# Altium PCB PCB1.PcbDoc
Units mil, origin at the board's own origin, x right, y up, seen from the top; angles counter-clockwise.
Board outline 3040 x 2075 mil, 2 copper layers (Top Layer, Bottom Layer); 46 components, 37 nets, 214 pads, 17 vias.
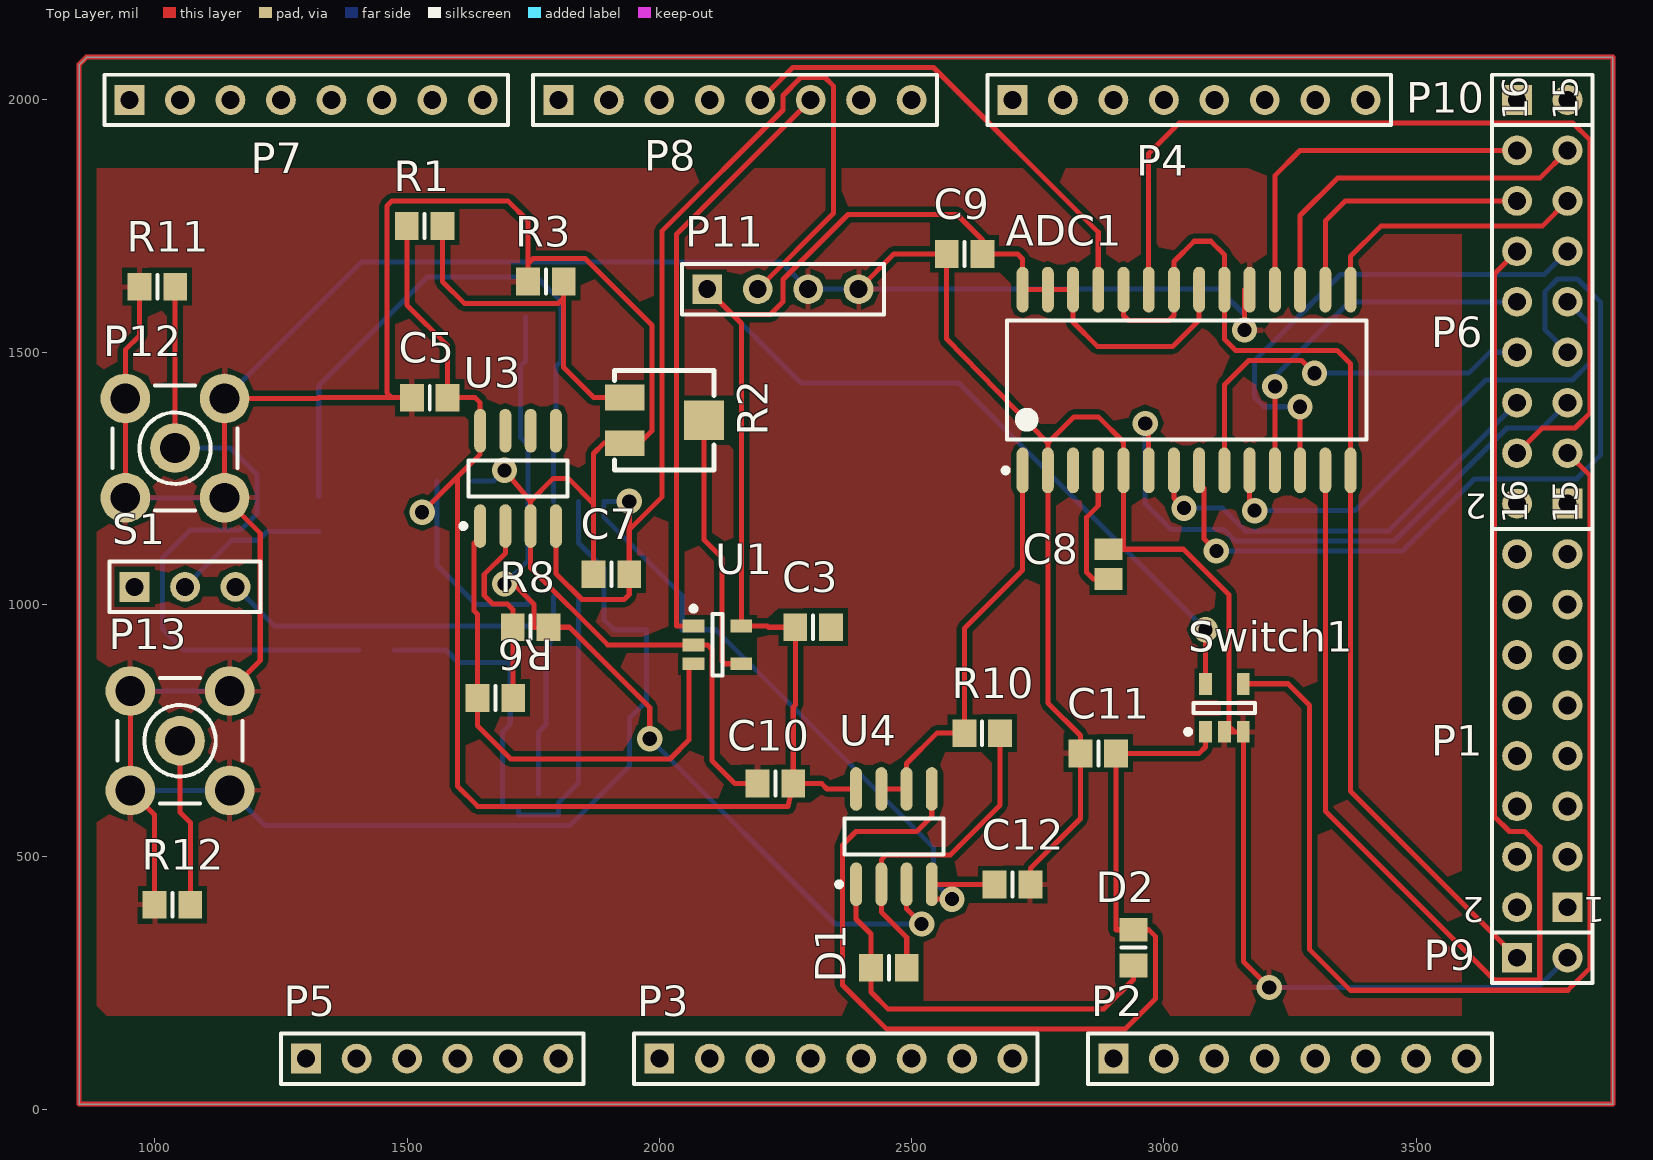
[diagram p0: Top Layer view]
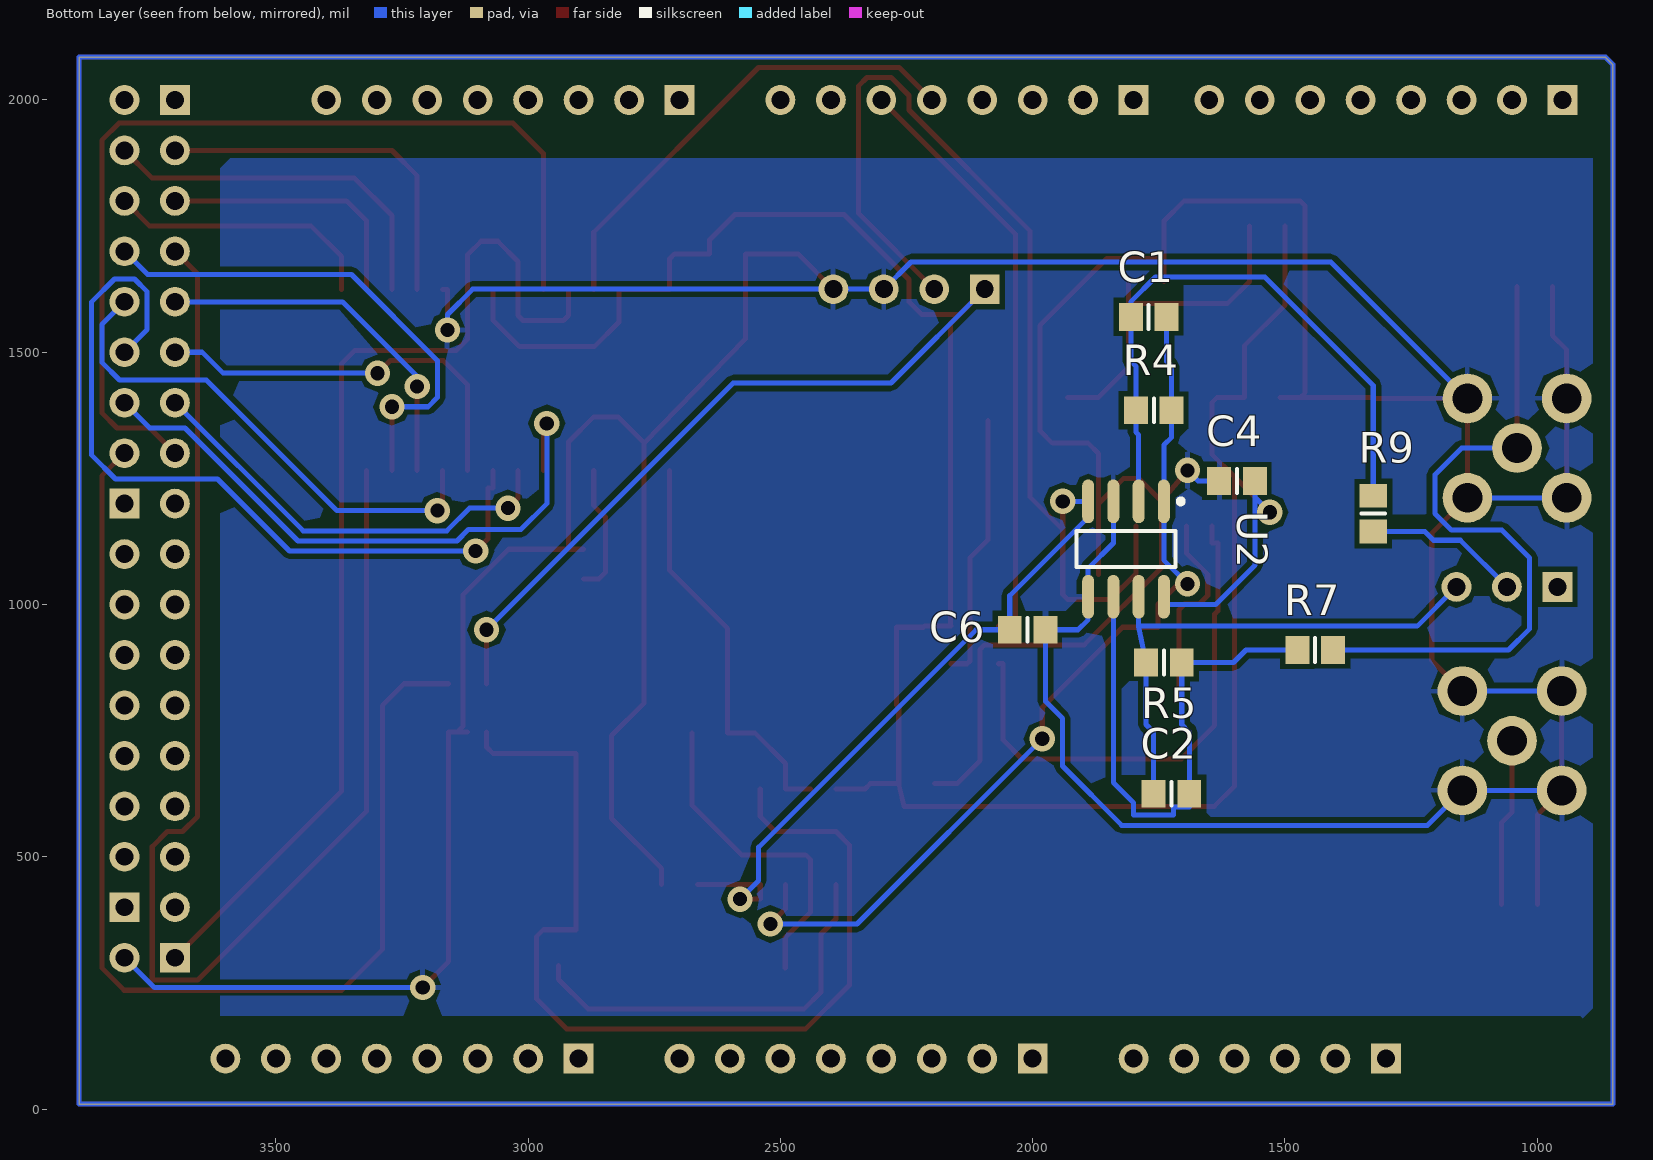
[diagram p1: Bottom Layer view, seen from below]

## Layer stack, top to bottom
Top Layer: signal copper 1.4
Dielectric: dielectric 12.6, FR-4, Dk 4.8
Bottom Layer: signal copper 1.4

## Board outline
850,10 850,2070 865,2085 3890,2085 3890,10

## Design rules (kind name [scope] priority, off if disabled: settings)
Clearance [All] p1: gap=10
PolygonConnect [All] p1: connectstyle=Relief reliefconductorwidth=10 reliefentries=4 polygonreliefangle="90 Angle"
RoomDefinition Sheet1 [InComponentClass('Sheet1')] p1: confinementstyle=ConfineIn formatcopy=TRUE lockcomponents=FALSE outline 850,10 3885,10 3885,2080 850,2080
RoutingTopology [InNetClass('digital')] p1: topology=Shortest
RoutingVias [All] p1: holewidth=28 width=50 viastyle="Through Hole" minholewidth=28 minwidth=50 maxholewidth=28 maxwidth=50
SilkscreenOverComponentPads [All] p1: minsilkscreentomaskgap=10
SolderMaskExpansion [All] p1: expansion=4
Width [All] p1: maxlimit=10 minlimit=10 preferedwidth=10
26 further rules are at their usual default settings.

## Classes and differential pairs
net class analog: NetADC1_1 NetADC1_4 NetC1_1 NetC1_2 NetC2_1 NetC2_2 NetC11_2 NetD1_1 NetD1_2 NetP12_1 NetP13_1 NetR1_2 NetR2_W NetR6_2
net class potencia: +5 -5 GND
net class digital: DGND NetADC1_6 NetADC1_7 NetADC1_8 NetADC1_9 NetADC1_10 NetADC1_11 NetADC1_12 NetADC1_13 NetADC1_15 NetADC1_16 NetADC1_17 NetADC1_18 NetADC1_23 NetADC1_25 NetP6_3

## Components (designator, comment, footprint, x,y, rotation, side; value= is the part's Value field where it differs from the comment)
ADC1 "LTC1415" SO28_N 3045,1445 r90 top
C1 "Cap" 6-0805_N 1770,1570 r180 bottom
C2 "Cap" 6-0805_N 1725,625 r0 bottom
C3 "Cap" 6-0805_N 2305,955 r0 top
C4 "Cap" 6-0805_N 1595,1245 r180 bottom
C5 "Cap" 6-0805_N 1545,1410 r0 top
C6 "Cap" 6-0805_N 2010,950 r180 bottom
C7 "Cap" 6-0805_N 1905,1060 r180 top
C8 "Cap Pol3" C0805 2890,1080 r90 top
C9 "Cap" 6-0805_N 2605,1695 r180 top
C10 "Cap" 6-0805_N 2230,645 r0 top
C11 "Cap" 6-0805_N 2870,705 r0 top
C12 "Cap" 6-0805_N 2700,445 r0 top
D1 "Diode" 6-0805_N 2455,280 r180 top
D2 "Diode" 6-0805_N 2940,320 r90 top
P1 "Header 8X2" HDR2X8 3800,400 r90 top
P2 "Header 8" HDR1X8 2900,100 r0 top
P3 "Header 8" HDR1X8 2000,100 r0 top
P4 "Header 8" HDR1X8 2700,2000 r0 top
P5 "Header 6" HDR1X6 1300,100 r0 top
P6 "Header 8X2" HDR2X8 3800,1200 r90 top
P7 "Header 8" HDR1X8 950,2000 r0 top
P8 "Header 8" HDR1X8 1800,2000 r0 top
P9 "Header 2" HDR1X2 3700,300 r0 top
P10 "Header 2" HDR1X2 3700,2000 r0 top
P11 "Header 4" HDR1X4 2095,1625 r0 top
P12 "SMB" SMB_V-RJ45 1040,1310 r0 top
P13 "SMB" SMB_V-RJ45 1050,730 r0 top
R1 "Res3" 6-0805_N 1535,1750 r0 top
R2 "RPot SM" POT4MM-2 2010,1365 r0 top
R3 "Res3" 6-0805_N 1775,1640 r0 top
R4 "Res3" 6-0805_N 1760,1385 r180 bottom
R5 "Res3" 6-0805_N 1740,885 r180 bottom
R6 "Res3" 6-0805_N 1675,815 r180 top
R7 "Res3" 6-0805_N 1440,910 r180 bottom
R8 "Res3" 6-0805_N 1745,955 r180 top
R9 "Res3" 6-0805_N 1325,1180 r90 bottom
R10 "Res3" 6-0805_N 2640,745 r0 top
R11 "Res3" 6-0805_N 1005,1630 r0 top
R12 "Res3" 6-0805_N 1035,405 r0 top
S1 "SW-SPDT" HDR1X3 960,1035 r0 top
Switch1 "SN74LVC1G66DBVR" SOT23-5_N 3120,795 r90 top
U1 "ADCMP600" SOT23-5_N 2115,920 r0 top
U2 "THS4062" S8_N 1815,1110 r270 bottom
U3 "THS4062" S8_N 1720,1250 r90 top
U4 "THS4062" S8_N 2465,540 r90 top

## Footprints (in the part's own frame and the unit in brackets; to place one, negate y for a bottom-side part, rotate by r counter-clockwise, add the part's x,y. Pads: shape width x height; smd on the part's side, far side on the other; paste and mask are expansions set on the pad)
6-0805_N [mm] "Chip Resistor, Body 2.0x1.2mm, IPC Medium Density"
  rect 1.2x1.4 smd: 1(-0.9,0) 2(0.9,0)
  silkscreen extent 0,-0.6 0,0.6, body extent -1.07,-0.7 1.07,0.7, height 0.7
C0805 [mm] "Chip Capacitor, Body 2.0x1.3mm, IPC High Density"
  rect 1.1x1.4 smd: 1(-0.75,0) 2(0.75,0)
  body extent -1.1,-0.72 1.1,0.72, height 1.4
HDR1X2 [mm] "Connector; Header; 2 Position"
  rect 1.5x1.5 hole 0.9: 1(0,0)
  round 1.5 hole 0.9: 2(2.54,0)
  silkscreen extent -1.27,-1.27 3.81,1.27
HDR1X3 [mm] "Connector; Header; 3 Position"
  rect 1.5x1.5 hole 0.9: 1(0,0)
  round 1.5 hole 0.9: 2(2.54,0) 3(5.08,0)
  silkscreen extent -1.27,-1.27 6.35,1.27
HDR1X4 [mm] "Connector; Header; 4 Position"
  rect 1.5x1.5 hole 0.9: 1(0,0)
  round 1.5 hole 0.9: 2(2.54,0) 3(5.08,0) 4(7.62,0)
  silkscreen extent -1.27,-1.27 8.89,1.27
HDR1X6 [mm] "Connector; Header; 6 Position"
  rect 1.5x1.5 hole 0.9: 1(0,0)
  round 1.5 hole 0.9: 2(2.54,0) 3(5.08,0) 4(7.62,0) 5(10.16,0) 6(12.7,0)
  silkscreen extent -1.27,-1.27 13.97,1.27
HDR1X8 [mm] "Connector; Header; 8 Position"
  rect 1.5x1.5 hole 0.9: 1(0,0)
  round 1.5 hole 0.9: 2(2.54,0) 3(5.08,0) 4(7.62,0) 5(10.16,0) 6(12.7,0) 7(15.24,0) 8(17.78,0)
  silkscreen extent -1.27,-1.27 19.05,1.27
HDR2X8 [mm] "Connector; Header; 8x2 Position"
  rect 1.5x1.5 hole 0.9: 1(0,0)
  round 1.5 hole 0.9: 2(0,2.54) 3(2.54,0) 4(2.54,2.54) 5(5.08,0) 6(5.08,2.54) 7(7.62,0) 8(7.62,2.54) 9(10.16,0) 10(10.16,2.54) 11(12.7,0) 12(12.7,2.54) 13(15.24,0) 14(15.24,2.54) 15(17.78,0) 16(17.78,2.54)
  silkscreen extent -1.27,-1.27 19.05,3.81
POT4MM-2 [mm] "Square Trimming Potentiometer"
  rect 2x1.3 smd: CCW(-2,-1.15) CW(-2,1.15)
  rect 2x2 smd: W(2,0)
  silkscreen extent -2.5,-2.5 2.5,2.5
S8_N [mm] "SOIC, 8-Leads, Body 4.9x3.9mm, Pitch 1.27mm, IPC Medium Density"
  oval 2.2x0.6 smd: 1(-2.4,1.905) 2(-2.4,0.635) 3(-2.4,-0.635) 4(-2.4,-1.905) 5(2.4,-1.905) 6(2.4,-0.635) 7(2.4,0.635) 8(2.4,1.905)
  silkscreen extent -2.52,-2.5 0.9,2.88, body extent -2,-2.5 2,2.5, height 1.76
SMB_V-RJ45 [mm] "Connector; SMB Straight"
  round 2.5 hole 1.5: 1(0,0) 2(-2.5,-2.5) 2(-2.5,2.5) 2(2.5,-2.5) 2(2.5,2.5)
  silkscreen extent -3.15,-3.15 3.15,3.15
SO28_N [mm] "28-Pin Plastic Small Outline Integrated Circuit 1.27 mm Pitch, IPC Medium Density"
  oval 2.3x0.6 smd: 1(-4.55,8.255) 2(-4.55,6.985) 3(-4.55,5.715) 4(-4.55,4.445) 5(-4.55,3.175) 6(-4.55,1.905) 7(-4.55,0.635) 8(-4.55,-0.635) 9(-4.55,-1.905) 10(-4.55,-3.175) 11(-4.55,-4.445) 12(-4.55,-5.715) 13(-4.55,-6.985) 14(-4.55,-8.255) 15(4.55,-8.255) 16(4.55,-6.985) 17(4.55,-5.715) 18(4.55,-4.445) 19(4.55,-3.175) 20(4.55,-1.905) 21(4.55,-0.635) 22(4.55,0.635) 23(4.55,1.905) 24(4.55,3.175) 25(4.55,4.445) 26(4.55,5.715) 27(4.55,6.985) 28(4.55,8.255)
  silkscreen extent -4.67,-9.05 3,9.23, body extent -3.8,-9.06 3.8,9.06, height 2.65
SOT23-5_N [mm] "SOT23, 5-Leads, Body 2.9x1.6mm, Pitch 0.95mm, Lead Span 2.8mm, IPC Medium Density"
  rect 1.1x0.65 smd: 1(-1.2,0.95) 2(-1.2,0) 3(-1.2,-0.95) 4(1.2,-0.95) 5(1.2,0.95)
  silkscreen extent -1.32,-1.55 0.25,1.95, body extent -0.9,-1.55 0.9,1.55, height 1.45

## Part data
C1 C2 C3 C4 C5 C6 C7 C9 C10 C11 C12: "Capacitor"
C8: "Polarized Capacitor (Surface Mount)"
D1 D2: "Default Diode"
P1 P6: "Header, 8-Pin, Dual row"
P2 P3 P4 P7 P8: "Header, 8-Pin"
P5: "Header, 6-Pin"
P9 P10: "Header, 2-Pin"
P11: "Header, 4-Pin"
P12 P13: "SMB Straight Connector"
R1 R3 R4 R5 R6 R7 R8 R9 R10 R11 R12: "Resistor"
R2: "Square Trimming Potentiometer"
S1: "SPDT Subminiature Toggle Switch, Right Angle Mounting, Vertical Actuation"
U2 U3 U4: library part LT1253CS8, "Low Cost Dual Video Amplifier"

## Via types
v1: diameter 50, hole 28, Top Layer to Bottom Layer, 17 vias

## Nets (pads, with @x,y where several pads share a name; then routed paths per layer and width w, separated by ;. In a path a pad name is that pad's centre, name@x,y a point inside that pad or via, vN(x,y) a via of type N, cw(c..) or ccw(c..) an arc to the next point about the centre after c; other vN are vias at no path point)
+5: ADC1.21 ADC1.26 ADC1.27 ADC1.28 C3.1 C4.2 C5.2 C9.1 C10.2 P11.1 R1.1 Switch1.5 U1.5 U2.8 U3.8 U4.8 | length 6407.2
  Top Layer w10: R1.1 1499.57,1593.87 1580.43,1513 C5.2 1635,1410 1645,1400 U3.8 1645,1298 1600,1253 ; v1(1530,1183) 1600,1253 ; P11.1 2145,1575 ; U1.5 U1.5@2163,957.4 ; U4.8 2332.51,634.49 2322,645 C10.2 ; ADC1.21 3070,1564 3017,1511 2869,1511 2820,1560 ADC1.26 ADC1.27 ADC1.28 2720,1685 2710,1695 C9.1 2640.43,1722.57 2590,1773 2374,1773 2245,1644 2245,1600 2220,1575 2145,1575 ; Switch1.5 v1(3082.6,950) ; 1600,1253 1600,640 1640,600 2255.43,600 C10.2 ; 2145,1575 2163,1557 U1.5@2163,957.4 ; U1.5@2163,957.4 2214,957.4 2216.4,955 C3.1 2269.57,801.13 2265.43,797 C10.2
  Bottom Layer w10: v1(1530,1183) 1559.57,1212.57 ; C4.2 1559.57,1212.57 ; U2.8 1740,1000.2 1637.36,1000.2 1559.57,1078 1559.57,1212.57 ; P11.1 2281,1439 2593.6,1439 v1(3082.6,950)
-5: C6.1 C7.1 C12.1 P11.2 U2.4 U3.4 U4.4 | length 3380.8
  Top Layer w10: U3.4 1795,1061.62 1846.62,1010 1930.43,1010 1940.43,1020 C7.1 1940.43,1148.43 ; v1(1940.43,1204.49) 1940.43,1148.43 ; P11.2 2345,1775 2345,2028 2328.47,2044.53 2280.53,2044.53 2245,2009 2245,1980 2005.63,1740.63 2005.63,1213.63 1940.43,1148.43 ; v1(2580,416) 2540,416 U4.4 2602,445.51 2602.51,445 C12.1
  Bottom Layer w10: v1(1940.43,1204.49) U2.4 1890,1173 2045.43,1017.57 C6.1 2112,950 2543,519 2543,453 v1(2580,416)
DGND: ADC1.14 ADC1.20 ADC1.22 ADC1.24 P9.1 | length 2145.2
  Top Layer w10: ADC1.24 2920,1573 2930,1563 3010,1563 3020,1573 ADC1.22 3020,1680 3060,1720 3093,1720 3120,1693 ADC1.20 3120,1526 3142.14,1503.86 3343.14,1503.86 3370,1477 ADC1.14 3370,630 P9.1
GND: ADC1.2 ADC1.5 ADC1.19 C4.1 C5.1 C6.2 C7.2 C8.2 C9.2 C10.1 C11.1 C12.2 P9.2 P11.3 P11.4 P12.2 P13.2 R2.CCW R3.1 R11.1 R12.1 Switch1.2 Switch1.3 U1.2 U2.3 U2.5 U3.3 | length 12907.1
  Top Layer w10: P12.2@941.57,1211.57 941.57,1408.43 941.57,1505 969.57,1532.99 R11.1 ; P13.2@951.57,828.43 951.57,631.57 999.57,583.58 R12.1 ; P13.2@1148.43,828.43 1209,889 1209,1141 1138.43,1211.57 1138.43,1408.43 1323,1408.43 1324.57,1410 1470,1410 ; C5.1 1470,1410 ; v1(1693,1266) 1745,1205 ; R3.1 1739.57,1675.57 ; C7.2 1869.57,1200 ; C10.1 2150,645 2104.41,690.59 2104.41,911 2095.41,920 U1.2 1897.56,920 1745,1072.56 U3.3 1745,1205 ; P11.4 2465,1695 C9.2 2569.57,1526.43 2770,1320 ; C12.2 2735.43,476.87 2834.57,576 C11.1 2834.57,740.43 2770,805 ADC1.2 2770,1320 ; C8.2 2920,1109.53 ; Switch1.2 3140,747.76 ; v1(3160,1544) 3160,1624.13 ADC1.19 ; v1(3209,241) 3157.4,292.6 Switch1.3 3140,747.76 ; 1470,1410 1460,1420 1460,1790 1470,1800 1699.57,1800 1739.57,1760 1739.57,1675.57 ; 1739.57,1675.57 1750,1686 1853,1686 1985.63,1553.37 1985.63,1344.36 1961,1319.72 R2.CCW 1890,1319.72 1869.57,1299.29 1869.57,1200 ; 1745,1205 1790,1250 1819.57,1250 1869.57,1200 ; 2770,1320 2822,1372 2870,1372 2920,1322 ADC1.5 2920,1109.53 ; 2920,1109.53 3039.13,1109.53 3129,1019.66 3129,758.76 3140,747.76
  Bottom Layer w10: P12.2@941.57,1211.57 P12.2@1138.43,1211.57 ; P13.2@951.57,631.57 1148.43,631.57 1217.56,562.44 1823.44,562.44 1940.91,679.91 1940.91,774.37 1974.57,808.03 C6.2 1910,950 1890,970 U2.5 1890,1072 1840,1122 U2.3 ; P13.2@951.57,828.43 P13.2@1148.43,828.43 ; P12.2@1138.43,1408.43 1409,1679 2241,1679 P11.3 P11.4 3110,1625 3160,1575 v1(3160,1544) ; C4.1 1672,1245 v1(1693,1266) ; v1(3209,241) 3741,241 P9.2
NetADC1_1: ADC1.1 R10.1 U4.6 U4.7 | length 808.6
  Top Layer w10: U4.7 U4.6 2490,685 2550,745 R10.1 2604.57,952.57 2720,1068 ADC1.1
NetADC1_4: ADC1.4 C8.1 | length 260.3
  Top Layer w10: ADC1.4 2870,1196 2847,1173 2847,1063.47 2860,1050.47 C8.1
NetADC1_6: ADC1.6 P6.5 | length 1236.2
  Top Layer w10: v1(2963,1359) 2970,1352 ADC1.6
  Bottom Layer w10: v1(2963,1359) 2963,1200 3014,1149 3118,1149 3141,1126 3456,1126 3680,1350 3750,1350 P6.5
NetADC1_7: ADC1.7 P6.6 | length 867
  Top Layer w10: ADC1.7 3020,1211 v1(3040,1191)
  Bottom Layer w10: v1(3040,1191) 3116.13,1191 3161.13,1146 3446,1146 P6.6
NetADC1_8: ADC1.8 P6.7 | length 1601.1
  Top Layer w10: ADC1.8 3070,1231 3080,1231 3080,1130 v1(3104,1106)
  Bottom Layer w10: v1(3104,1106) 3473,1106 3615.65,1248.65 3817.65,1248.65 3865,1296 3865,1600 3820,1645 3780,1645 3755,1620 3755,1545 P6.7
NetADC1_9: ADC1.9 P6.8 | length 797.5
  Top Layer w10: ADC1.9 3120,1435.82 3168.03,1483.86 3273.14,1483.86 v1(3298.5,1458.5)
  Bottom Layer w10: v1(3298.5,1458.5) 3604.5,1458.5 3646,1500 P6.8
NetADC1_10: ADC1.10 P6.9 | length 1009.4
  Top Layer w10: ADC1.10 3170,1196 v1(3180,1186)
  Bottom Layer w10: v1(3180,1186) 3378.83,1186 3637.83,1445 3810,1445 3845,1480 3845,1555 P6.9
NetADC1_11: ADC1.11 P6.10 | length 727.4
  Top Layer w10: ADC1.11 v1(3220,1432)
  Bottom Layer w10: v1(3220,1432) 3220,1452 3368,1600 P6.10
NetADC1_12: ADC1.12 P6.11 | length 1006.8
  Top Layer w10: ADC1.12 v1(3270,1392)
  Bottom Layer w10: v1(3270,1392) 3198.25,1392 3180,1410.25 3180,1483.86 3350.14,1654 3754,1654 P6.11
NetADC1_13: ADC1.13 P6.12 | length 2756.9
  Top Layer w10: ADC1.13 3320,590.94 3655.47,255.47 3745,255.47 3745,520 3715,550 3685,550 3655,580 3655,1655 P6.12
NetADC1_15: ADC1.15 P6.13 | length 541.4
  Top Layer w10: ADC1.15 3370,1690 3430,1750 3750,1750 P6.13
NetADC1_16: ADC1.16 P6.14 | length 532.4
  Top Layer w10: ADC1.16 3320,1760 3360,1800 P6.14
NetADC1_17: ADC1.17 P6.15 | length 730.3
  Top Layer w10: ADC1.17 3270,1771 3344,1845 3745,1845 P6.15
NetADC1_18: ADC1.18 P6.16 | length 726.6
  Top Layer w10: ADC1.18 3220,1850 3270,1900 P6.16
NetADC1_23: ADC1.23 P6.4 | length 1901.9
  Top Layer w10: ADC1.23 2970,1894 3030,1954 3811,1954 3845,1920 3845,1380 3815,1350 3750,1350 P6.4
NetADC1_25: ADC1.25 P8.5 | length 945.8
  Top Layer w10: P8.5 2264.53,2064.53 2543.47,2064.53 2870,1738 ADC1.25
NetC1_1: C1.1 R4.1 R9.2 U2.2 | length 1210.3
  Bottom Layer w10: R9.2 1325,1434 1540,1649 1756.43,1649 1805.43,1600 C1.1 1805.43,1482 1795.43,1472 R4.1 1795.43,1341.56 1790,1336.13 U2.2
NetC1_2: C1.2 R4.2 R8.1 U2.1 U4.3 | length 1818.8
  Top Layer w10: v1(1693,1041) 1711,1041 1752,1000 1752,955 R8.1 1822,955 1981,796 v1(1981,734) ; U4.3 2490,397 v1(2520,367)
  Bottom Layer w10: v1(1693,1041) 1740,1088 U2.1 1740,1316.13 1724.57,1331.56 R4.2 1724.57,1472 1734.57,1482 C1.2 ; v1(1981,734) 2348,367 v1(2520,367)
NetC2_1: C2.1 R5.2 R7.1 U2.6 | length 1108.3
  Bottom Layer w10: R7.1 1577,910 1602,885 R5.2 1704.57,762 1689.57,747 C2.1 1689.57,599 1721,599 1721,582.44 1800,582.44 1800,607 1840,647 U2.6
NetC2_2: C2.2 R5.1 S1.3 U2.7 | length 1060.5
  Bottom Layer w10: S1.3 1238,957 1790,957 ; C2.2 1760.43,747 1775.43,762 R5.1 1790,957 ; U2.7 1790,957
NetC11_2: C11.2 D2.2 Switch1.1 U4.5 | length 1982.1
  Top Layer w10: U4.5 2540,580 2510,550 2390,550 2363,523 2363,246 2450,159 2924,159 2983,218 2983,342.43 2970,355.43 D2.2 2905.43,355.43 C11.2 3070,705 3082.6,717.6 Switch1.1
NetD1_1: D1.1 R10.2 U4.2 | length 657.8
  Top Layer w10: D1.1 2490.43,340 2440,390.43 U4.2 2440,494 2450,504 2577,504 2675.43,602.43 R10.2
NetD1_2: D1.2 D2.1 U4.1 | length 811.8
  Top Layer w10: U4.1 2390,376.57 2419.57,347 D1.2 2419.57,232 2453,198.57 2881.57,198.57 2940,257 D2.1
NetP6_3: P6.3 Switch1.4 | length 2280.6
  Top Layer w10: Switch1.4 3157.4,843 3246,843 3289,800 3289,316 3369.53,235.47 3800.47,235.47 3845,280 3845,1255 P6.3
NetP8_6: P8.6 U1.1 | length 1186.5
  Top Layer w10: U1.1 2034,957.4 2034,1734 P8.6
NetP12_1: P12.1 R7.2 R11.2 | length 1353.2
  Top Layer w10: P12.1 1040,1470 1040.43,1470.43 R11.2
  Bottom Layer w10: P12.1 1150,1310 1202.64,1257.36 1202.64,1180 1170,1147.36 1070,1147.36 1015,1092.36 1015,952 1057,910 R7.2
NetP13_1: P13.1 R12.2 | length 333.5
  Top Layer w10: P13.1 1050,588.43 1070.43,568 R12.2
NetR1_2: R1.2 R2.CW R3.2 | length 687.8
  Top Layer w10: R1.2 1570.43,1640 1613.43,1597 1800,1597 1810.43,1607.43 ; R3.2 1810.43,1607.43 ; R2.CW 1870,1410.28 1810.43,1469.84 1810.43,1607.43
NetR2_W: R2.W U1.4 | length 531.7
  Top Layer w10: R2.W 2088.74,1128.26 2124.41,1092.59 2124.41,888.19 2130,882.6 U1.4
NetR6_1: R6.1 R8.2 U3.2 | length 398.4
  Top Layer w10: U3.2 1695,1101.81 1653,1059.81 1653,1018 1670,1001 1698.57,1001 1709.57,990 R8.2 1709.57,884.87 1710.43,884 R6.1
NetR6_2: R6.2 U1.3 U3.1 | length 1032.1
  Top Layer w10: U3.1 1645,1122.32 1633,1122.32 1633,987.57 1639.57,981 R6.2 1639.57,760 1705.57,694 2021,694 2059,732 2059,882.6 U1.3
NetR9_1: R9.1 S1.2 | length 310.4
  Bottom Layer w10: S1.2 1152.36,1127.36 1205.43,1127.36 1222.64,1144.57 R9.1
NetS1_1: S1.1
pads on no net: ADC1.3 C3.2 P1.1 P1.2 P1.3 P1.4 P1.5 P1.6 P1.7 P1.8 P1.9 P1.10 P1.11 P1.12 P1.13 P1.14 P1.15 P1.16 P2.1 P2.2 P2.3 P2.4 P2.5 P2.6 P2.7 P2.8 P3.1 P3.2 P3.3 P3.4 P3.5 P3.6 P3.7 P3.8 P4.1 P4.2 P4.3 P4.4 P4.5 P4.6 P4.7 P4.8 P5.1 P5.2 P5.3 P5.4 P5.5 P5.6 P6.1 P6.2 P7.1 P7.2 P7.3 P7.4 P7.5 P7.6 P7.7 P7.8 P8.1 P8.2 P8.3 P8.4 P8.7 P8.8 P10.1 P10.2 U3.5 U3.6 U3.7

## Polygon pours and split planes (outlines as drawn)
GND on Top Layer "Top Layer-No Net" (solid, pour order 2): 885,1895 885,205 890,200 905,185 3590,185 3590,1860 3575,1875 3565,1865 885,1865
GND on Bottom Layer "Top Layer-No Net" (solid, pour order 4): 890,1885 890,200 910,180 915,185 3610,185 3610,1865 3590,1885

## Other copper
Multi-Layer:
  the board outline again, w10

## Text inside footprints (layer, text, board x,y; h text height)
P1: Top Overlay "16" at 3720,1160 h50 r90; Top Overlay "15" at 3820,1160 h50 r90; Top Overlay "1" at 3875,420 h50 r180; Top Overlay "2" at 3635,420 h50 r180
P6: Top Overlay "16" at 3720,1960 h50 r90; Top Overlay "15" at 3820,1960 h50 r90; Top Overlay "2" at 3640,1220 h50 r180